# Altium PCB CH32V003-NFC-EVT-R0-1v0.PcbDoc
Units mm, origin at the board's own origin, x right, y up, seen from the top; angles counter-clockwise.
Board outline 40 x 80 mm, 2 copper layers (Top Layer, Bottom Layer); 47 components, 37 nets, 140 pads, 149 vias.
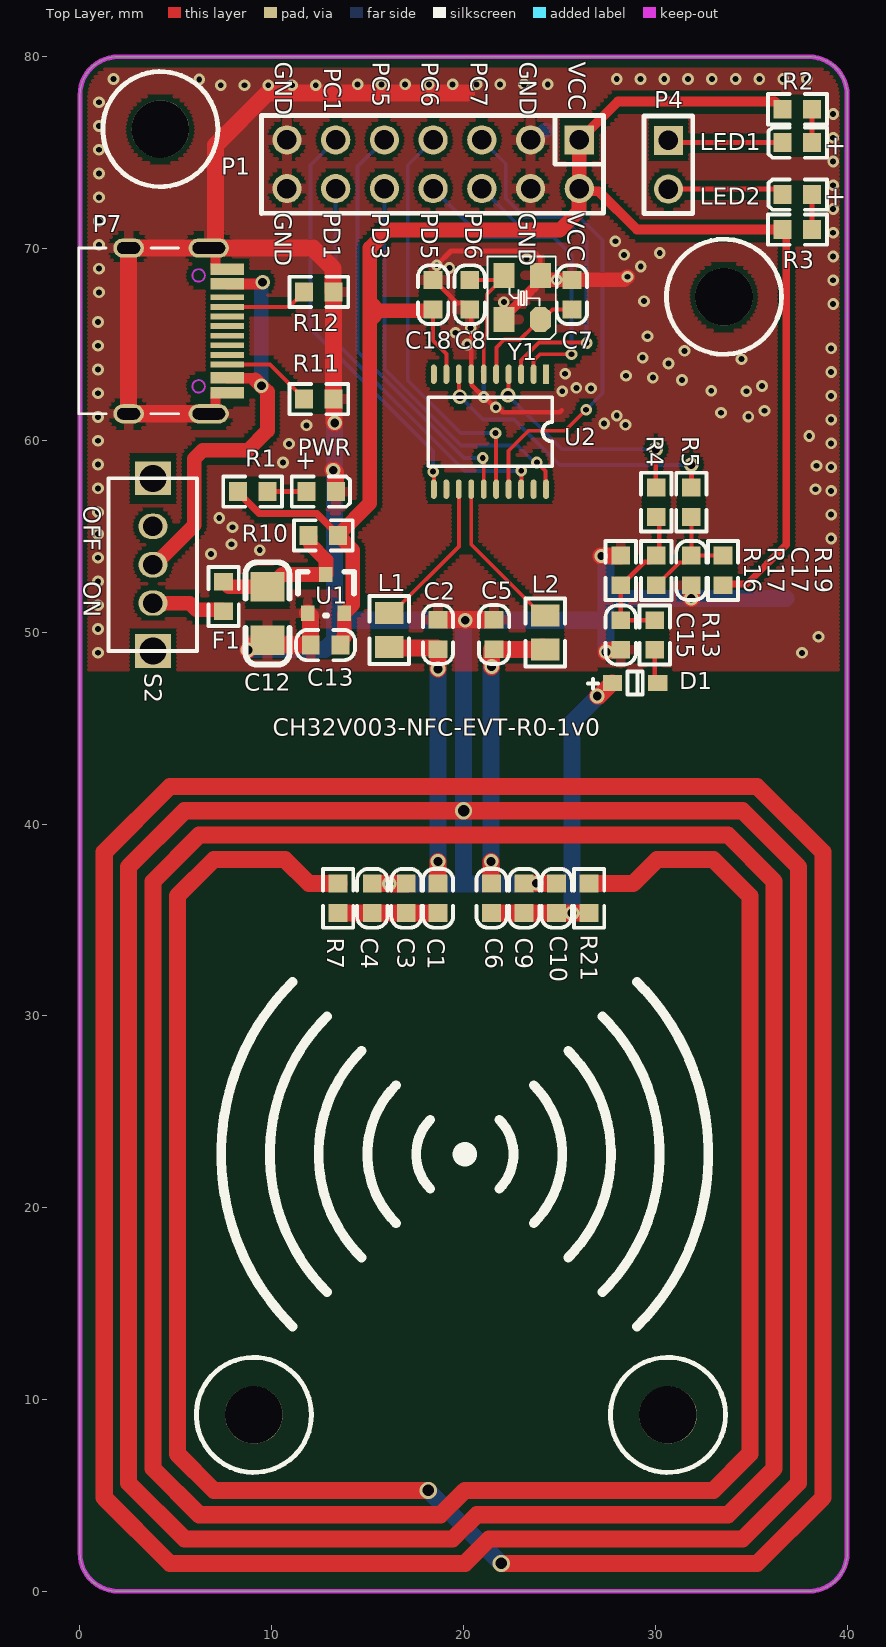
[diagram p0: Top Layer view]
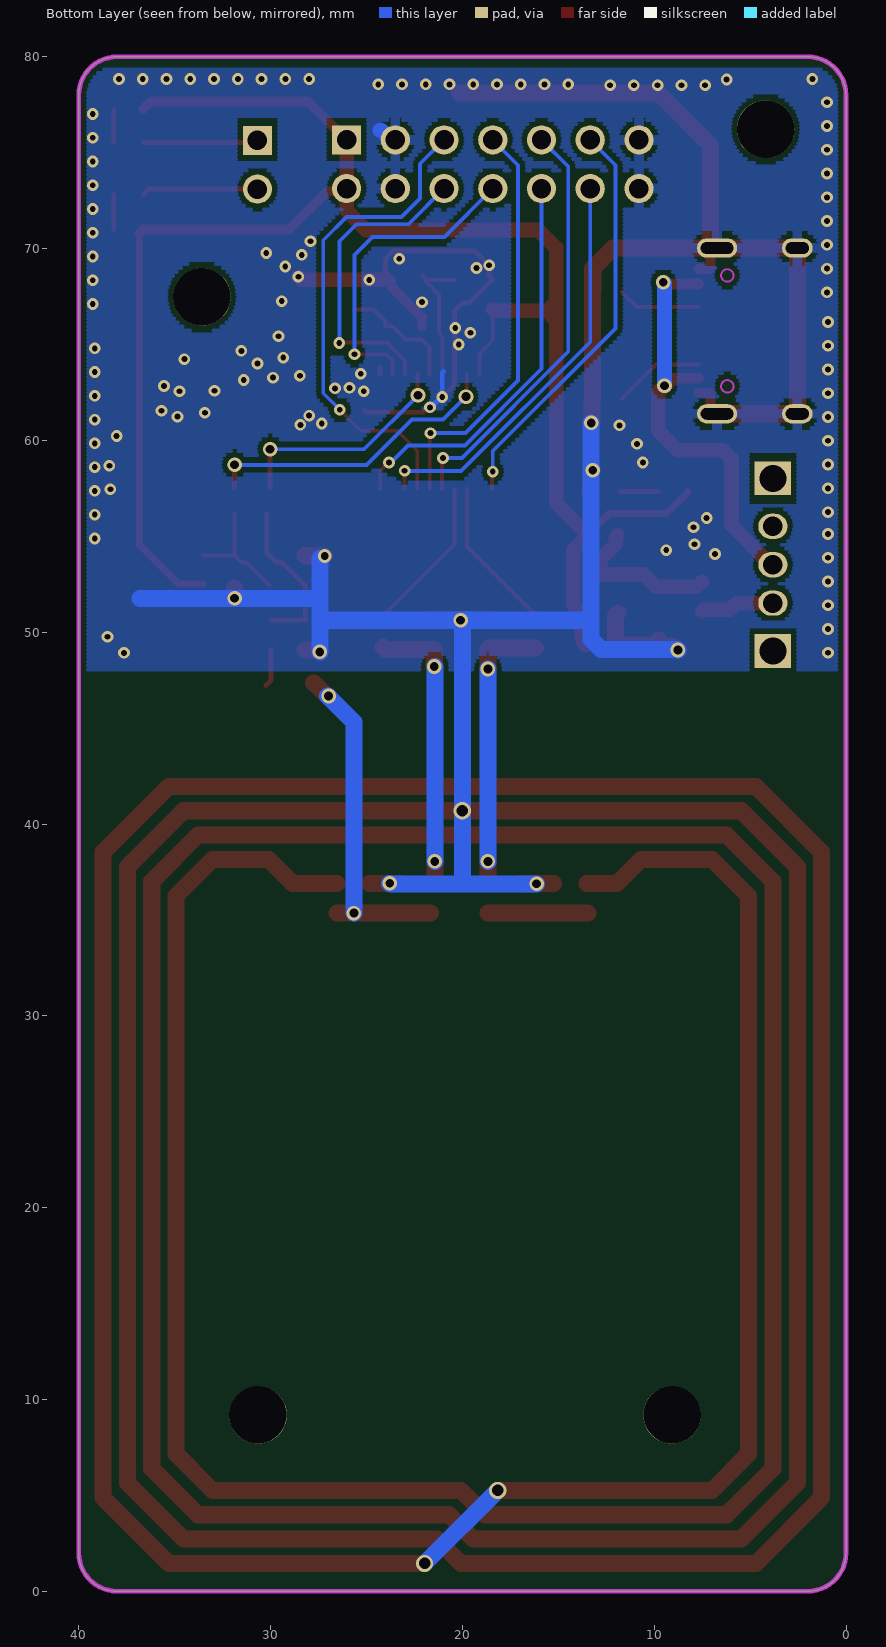
[diagram p1: Bottom Layer view, seen from below]

## Layer stack, top to bottom
Top Solder: solder mask 0.0102, Solder Resist, Dk 3.5
Top Layer: signal copper 0.0356
Dielectric 1: dielectric 0.32, FR-4, Dk 4.8
Bottom Layer: signal copper 0.0356
Bottom Solder: solder mask 0.0102, Solder Resist, Dk 3.5

## Board outline
0,2 0,78 cw(c2,78) 2,80 38,80 cw(c38,78) 40,78 40,2 cw(c38,2) 38,0 2,0 cw(c2,2)

## Design rules (kind name [scope] priority, off if disabled: settings)
Clearance Clearance_1 [InPolygon] p1: gap=0.254 ignorepadtopadclearanceinfootprint=FALSE
Clearance [All] p2: gap=0.152 ignorepadtopadclearanceinfootprint=FALSE except(0.203: Arc-Via Track-Via SMDPad-Via THPad-Via Via-Via Via-Fill Via-Poly Via-Region Via-Hole)
ComponentClearance [All] p1 off: gap=0.254 collisioncheckmode=3 verticalgap=0.254 showdistances=FALSE
DiffPairsRouting [All] p1: maxlimit=0.254 minlimit=0.178 mostfreqgap=0.203 toplayer_minwidth=0.152 toplayer_maxwidth=0.381 toplayer_prefwidth=0.203 bottomlayer_minwidth=0.152 bottomlayer_maxwidth=0.381 bottomlayer_prefwidth=0.203 maxuncoupledlength=12.7
MinimumSolderMaskSliver [All] p1 off: minsoldermaskwidth=0.254
PolygonConnect PolygonConnect_1 [IsVia] p1: connectstyle=Direct reliefconductorwidth=0.254 reliefentries=4 polygonreliefangle="90 Angle" airgapwidth=0.254
PolygonConnect [All] p2: connectstyle=Relief reliefconductorwidth=0.508 reliefentries=4 polygonreliefangle="90 Angle" airgapwidth=0.254
RoutingVias [All] p1: holewidth=0.406 width=0.711 viastyle="Through Hole" minholewidth=0.305 minwidth=0.61 maxholewidth=0.711 maxwidth=1.27
SilkToSilkClearance [All] p1 off: silktosilkclearance=0.254
SilkToSolderMaskClearance [IsPad] p1 off: minsilkscreentomaskgap=0.254 clearancetoexposedcopper=TRUE
SolderMaskExpansion [All] p1: expansion=0.051 istentingtop=FALSE
Width [All] p1: maxlimit=2.54 minlimit=0.152 preferedwidth=0.254
25 further rules are at their usual default settings.

## Classes and differential pairs
component class CH32V003-NFC-EVT-R0-1v0: C1 C2 C3 C4 C5 C6 C7 C8 C9 C10 C12 C13 C15 C17 C18 D1 F1 L1 L2 LED1 LED2 P1 P4 P7 PWR R1 R2 R3 R4 R5 R7 R10 R11 R12 R13 R16 R17 R19 R21 S2 U1 U2 Y1

## Components (designator, comment, footprint, x,y, rotation, side; value= is the part's Value field where it differs from the comment)
C1 "30pF" 0603_C 18.669,36.897 r270 top
C2 "100pF" 0603_C 18.669,50.648 r270 top
C3 "NC" 0603_C 17.018,36.897 r270 top
C4 "220pf" 0603_C 15.24,36.897 r270 top
C5 "100pF" 0603_C 21.59,49.108 r90 top
C6 "30pF" 0603_C 21.463,36.897 r270 top
C7 "20pF" 0603_C 25.654,68.367 r270 top
C8 "20pF" 0603_C 20.32,66.827 r90 top
C9 "NC" 0603_C 23.156,35.357 r90 top
C10 "220pf" 0603_C 24.85,35.357 r90 top
C12 "10uF" 3216_C 9.779,52.375 r90 top
C13 "2.2uF" 0603_C 12.037,49.327 r0 top
C15 "110pF" 0603_C 28.194,49.082 r90 top
C17 "110pF" 0603_C 31.877,52.451 r90 top
C18 "0.1uF" 0603_C 18.415,68.367 r270 top value=15pF
D1 "Diode BAS70WS" SOD-323 27.764,47.346 r0 top
F1 "500mA" 0603 7.493,51.089 r90 top
L1 "1uH 300mΩ" 0805 16.129,51.003 r270 top
L2 "1uH 300mΩ" 0805 24.257,50.876 r270 top
LED1 "LED1   blue" 0603+ 38.176,75.523 r180 top
LED2 "LED2  blue" 0603+ 38.176,72.813 r180 top
P1 "Header 7X2" IDC14-2.54mm 26.035,75.667 r270 top
P4 "2HEAD" SIP2-2.54mm 30.683,75.641 r180 top
P7 "TYPE-C" TYPE-C-Receptacle-2.0 7.69,65.708 r270 top
PWR "POWER  red" 0603+ 11.811,57.328 r0 top
R1 "1K" 0603 9.779,57.328 r180 top
R2 "1K" 0603 36.636,77.267 r0 top
R3 "1K" 0603 36.636,70.993 r0 top
R4 "20k" 0603 30.048,57.547 r270 top
R5 "110k" 0603 31.877,56.007 r90 top
R7 "1Ω(4.7Ω)" 0603 13.462,35.357 r90 top
R10 "0R" 0603 11.922,55.042 r0 top value=NC(0R)
R11 "0R" 0603 11.684,62.154 r0 top value=NC(5.1K)
R12 "0R" 0603 11.684,67.742 r0 top value=NC(5.1K)
R13 "1k" 0603 29.972,49.082 r90 top
R16 "18K" 0603 28.194,53.991 r270 top
R17 "27K" 0603 30.048,52.451 r90 top
R19 "5.1M" 0603 33.528,52.451 r90 top
R21 "1Ω(4.7Ω)" 0603 26.543,35.357 r90 top
S2 "SW" SW1 3.81,53.518 r270 top
U1 "6219P33M" SOT-23 11.877,50.99 r0 top
U2 "CH32V003F4P6" TSSOP20 24.303,63.449 r180 top
Y1 "13.56MHz" XT3225 24.003,66.305 r90 top
? "Comment" HOLE 4.191,76.225 r0 top
? "Comment" HOLE 33.579,67.488 r0 top
? "Comment" HOLE 30.658,9.195 r0 top
? "Comment" HOLE 9.068,9.195 r0 top

## Footprints (in the part's own frame and the unit in brackets; to place one, negate y for a bottom-side part, rotate by r counter-clockwise, add the part's x,y. Pads: shape width x height; smd on the part's side, far side on the other; paste and mask are expansions set on the pad)
0603 [mm]
  rect 0.93x0.98 smd: 1(0,0) 2(1.54,0)
  silkscreen extent -0.76,-0.79 2.3,0.79
0603+ [mm]
  rect 0.93x0.98 smd: 1(0,0) 2(1.54,0)
  silkscreen extent -0.76,-0.79 2.27,0.79
0603_C [mm]
  rect 0.93x0.98 smd mask+0.051: 1(0,0) 2(1.54,0)
  silkscreen extent -0.76,-0.79 2.31,0.79
0805 [mm]
  rect 1.16x1.47 smd: 1(0,0) 2(1.78,0)
  silkscreen extent -0.88,-1.04 2.66,1.03
3216_C [mil]
  rect 60x70 smd: 1(0,0) 2(-110,0)
  silkscreen extent -160,-45 50,45
HOLE [mm]
  round 3 hole 3: 0(0,0)
  silkscreen extent -3,-3 3,3
IDC14-2.54mm [mil]
  rect 60x60 hole 40: 1(0,0)
  round 60 hole 40: 2(100,0) 3(0,-100) 4(100,-100) 5(0,-200) 6(100,-200) 7(0,-300) 8(100,-300) 9(0,-400) 10(100,-400) 11(0,-500) 12(100,-500) 13(0,-600) 14(100,-600)
  silkscreen extent -50,-652 151,50
SIP2-2.54mm [mil]
  rect 60x60 hole 40: 1(0,0)
  round 60 hole 40: 2(0,100)
  silkscreen extent -50,-50 50,150
SOD-323 [mm]
  rect 1x0.83 smd: 1(0,0) 2(2.36,0)
  silkscreen extent -1.28,-0.6 1.58,0.6
SOT-23 [mm]
  rect 0.7x0.8 smd: 1(0,0) 2(1.9,0) 3(0.95,2.02)
  silkscreen extent -0.51,-0.13 2.41,2.16
SW1 [mm]
  rect 1.75x1.9 hole 1.4: 0(-4.5,0) 0(4.5,0)
  oval 1.321x1.524 hole 1.016: 1(0,0) 2(-2,0) 3(2,0)
  silkscreen extent -4.51,-2.31 4.5,2.29
TSSOP20 [mil]
  rect 12x40 smd: 1(0,0)
  oval 12x40 smd: 2(25.6,0) 3(51.2,0) 4(76.8,0) 5(102.4,0) 6(128,0) 7(153.5,0) 8(179.1,0) 9(204.7,0) 10(230.3,0) 11(230.3,236) 12(204.7,236) 13(179.1,236) 14(153.5,236) 15(128,236) 16(102.4,236) 17(76.8,236) 18(51.2,236) 19(25.6,236) 20(0,236)
  silkscreen extent -13,47 242,189
TYPE-C-Receptacle-2.0 [mm]
  oval 1x2.1 hole 0.6 slot 1.7 at 90 deg: 0(-4.32,-0.97) 0(4.32,-0.97)
  oval 1x1.6 hole 0.6 slot 1.2 at 90 deg: 0(-4.32,-5.15) 0(4.32,-5.15)
  rect 0.6x1.75 smd mask+0.051: A1(-3.225,0) A4(-2.45,0) B1(3.225,0) B4(2.45,0)
  rect 0.3x1.75 smd mask+0.051: A5(-1.25,0) A6(-0.25,0) A7(0.25,0) A8(1.25,0) B5(1.75,0) B6(0.75,0) B7(-0.75,0) B8(-1.75,0)
  Keep-Out Layer circle w0.1: c2.89,-1.5 r0.325
  Keep-Out Layer circle w0.1: c-2.89,-1.5 r0.325
  silkscreen extent -4.32,-7.75 4.32,-2.55
XT3225 [mm]
  oct 1.3x1.1 smd: 1(0,0)
  rect 1.3x1.1 smd: 2(2.3,0) 3(2.3,1.9) 4(0,1.9)
  silkscreen extent -1.02,-0.8 3.27,2.74

## Part data
C1 C2 C3 C4 C5 C6 C7 C8 C9 C10 C12 C13 C15 C17: library part CAP, "Capacitor"
C18: library part Cap, "Capacitor", LatestRevisionDate=17-Jul-2002, LatestRevisionNote="Re-released for DXP Platform.", PackageReference=RAD-0.3, Published=8-Jun-2000, Publisher="Altium Limited"
D1: library part "Diode BAS70", "Silicon AF Schottky Diode for High-Speed Switching", ComponentLink1Description="Manufacturer Link", ComponentLink1URL=http://www.infineon.com/, ComponentLink2Description=Datasheet, ComponentLink2URL=http://www.infineon.com/upload/Document/cmc_upload/documents/009/382/bas40_bas140series_1.pdf, DatasheetVersion=Oct-1999, LatestRevisionDate=29-May-2009, LatestRevisionNote="IPC-7351 Footprint Added.", Note="Pin 2 is not connected and not drawn.", PackageDescription="3-Pin SOT-23 Package 0.95 mm Pitch, 2.5 mm Lead Span", PackageReference=SOT-23, PackageVersion=Sep-2001, Published=21-Mar-2003, Publisher="Altium Limited"
F1: library part FUSE1, "Fuse"
L1 L2: library part INDUCTOR
LED1 LED2 PWR: library part LED0, "Typical INFRARED GaAs LED", LatestRevisionDate=08-Jul-2005, LatestRevisionNote="Mech Layer 1 removed.", PackageReference=LED-0, Published=8-Jun-2000, Publisher="Altium Limited"
P1: "Header, 7-Pin, Dual row", LatestRevisionDate=17-Jul-2002, LatestRevisionNote="Re-released for DXP Platform.", Publisher="Altium Limited"
P7: library part TYPE-C1
R1 R2 R3 R10 R11 R12: library part "Res Semi", "Semiconductor Resistor", LatestRevisionDate=17-Jul-2002, LatestRevisionNote="Re-released for DXP Platform.", PackageReference=AXIAL-0.5, Published=8-Jun-2000, Publisher="Altium Limited"
R4 R5 R7 R13 R16 R17 R19 R21: library part RES
U2: "RISC-V MCU, 48MHz"
Y1: library part XTAL, "Crystal Oscillator", LatestRevisionDate=17-Jul-2002, LatestRevisionNote="Re-released for DXP Platform.", PackageDescription="Crystal, Thru-Hole; 2 Leads; Body 3.1 x 8.2 mm (Dia.xH)", PackageReference=R38, Published=8-Jun-2000, Publisher="Altium Limited"

## Via types
v1: diameter 0.61, hole 0.305, Top Layer to Bottom Layer, tented both sides, 125 vias
v2: diameter 0.762, hole 0.457, Top Layer to Bottom Layer, tented both sides, 20 vias
v3: diameter 0.9, hole 0.6, Top Layer to Bottom Layer, tented both sides, 3 vias
v4: diameter 0.711, hole 0.406, Top Layer to Bottom Layer, tented both sides, 1 vias

## Nets (pads, with @x,y where several pads share a name; then routed paths per layer and width w, separated by ;. In a path a pad name is that pad's centre, name@x,y a point inside that pad or via, vN(x,y) a via of type N, cw(c..) or ccw(c..) an arc to the next point about the centre after c; other vN are vias at no path point)
+5V: P7.A4 P7.B4 S2.1 | length 22.6
  Top Layer w0.559: P7.B4 7.711,63.237 9.077,63.237 9.144,63.17 ; P7.A4 9.378,68.158 9.47,68.25 v2(9.525,68.25)
  Top Layer w0.762: S2.1 3.912,53.518 5.969,55.575 5.969,59.04 6.415,59.487 8.763,59.487 9.779,60.503 9.779,62.535 v2(9.461,62.852) 9.144,63.17
  Bottom Layer w0.762: v2(9.461,62.852) 9.461,68.186 v2(9.525,68.25)
ANT_OUT_0: L1.1 U2.13 | length 8
  Top Layer w0.203: L1.1 16.284,51.003 19.754,54.473 U2.13
ANT_OUT_1: L2.1 U2.14 | length 8.3
  Top Layer w0.203: U2.14 20.404,54.574 24.102,50.876 L2.1
GND: C2.1 C3.1 C4.1 C5.2 C7.1 C8.1 C9.2 C10.2 C12.2 C13.1 C15.1 C17.1 C18.1 P1.3 P1.4 P1.13 P1.14 P7.0 P7.A1 P7.B1 PWR.2 R7.2 R11.2 R12.2 R16.1 R21.2 U1.1 U2.7 Y1.2 Y1.4 | length 699.6
  Top Layer w0.254: Y1.2 24.003,69.494 23.622,69.875 19.348,69.875 v1(18.605,69.132) 18.605,68.557 C18.1 18.44,68.367 19.642,67.165 19.982,67.165 C8.1 20.404,66.744 U2.7 20.404,63.08 20.429,63.054 20.429,62.883 v1(21.053,62.259) 21.1,62.259 21.638,61.722 v1(21.686,61.722) 21.782,61.722 22.036,61.468 25.019,61.468 25.121,61.57
  Top Layer w0.508: P7.0@6.72,61.388 6.842,61.388 7.069,61.615 7.069,62.437 7.115,62.483 P7.B1 ; P7.0@6.72,70.028 6.842,70.028 7.069,69.801 7.069,68.979 7.115,68.933 P7.A1 ; Y1.4@22.103,65.95 Y1.4@22.103,66.05 ; Y1.4@22.103,66.405 23.707,68.009 23.707,68.309 Y1.2 24.222,68.387 24.835,68.387 v1(24.854,68.367)
  Top Layer w0.762: Y1.2@24.13,68.367 v1(24.854,68.367) C7.1 28.388,68.367 v1(28.55,68.529)
  Top Layer w0.889: P7.0@6.72,61.388 2.54,61.388 2.54,70.028 P7.0@6.72,70.028 ; P7.0@6.842,70.028 P7.0@7.01,70.028 ; v2(8.763,49.073) 8.953,49.263 9.461,49.263 C12.2 9.779,49.327 C13.1 12.017,49.347 12.017,50.85 U1.1 ; v2(13.208,58.445) 13.33,58.323 13.33,57.348 PWR.2 ; v2(13.284,60.909) 13.244,60.949 13.244,62.133 R11.2 R12.2 13.203,67.762 13.203,68.965 12.141,70.028 P7.0@7.01,70.028 ; R7.2@13.507,36.897 R7.2 11.938,36.897 10.684,38.151 6.985,38.151 5.08,36.246 5.08,7.163 6.985,5.258 v3(18.161,5.258) ; C4.1 C3.1 ; v2(16.129,36.881) C3.1@17.018,36.881 ; v2(20.091,50.622) 20.086,50.628 18.69,50.628 C2.1 C5.2 ; 20.142,78.105 18.194,78.105 15.717,78.105 9.779,78.105 7.061,75.387 7.061,70.079 P7.0@7.01,70.028 ; v3(21.971,1.448) 35.306,1.448 38.735,4.877 38.735,38.532 35.306,41.961 4.699,41.961 1.27,38.532 1.27,4.877 4.699,1.448 20.066,1.448 21.336,2.718 34.544,2.718 37.465,5.639 37.465,37.77 34.544,40.691 v3(20.002,40.691) 5.461,40.691 2.54,37.77 2.54,5.639 5.461,2.718 19.431,2.718 20.701,3.988 33.782,3.988 36.195,6.401 36.195,37.008 33.782,39.421 6.223,39.421 3.81,37.008 3.81,6.401 6.223,3.988 18.796,3.988 20.066,5.258 33.02,5.258 34.925,7.163 34.925,36.246 33.02,38.151 30.099,38.151 28.845,36.897 R21.2 ; C9.2 C10.2 24.839,36.907 v2@24.111,36.907 ; v2(23.791,36.907) v2@24.111,36.907 ; v2@24.122,36.897 v2@24.111,36.907 ; v4(27.178,53.975) 28.178,53.975 R16.1 ; v2(27.432,48.971) 27.522,49.062 28.173,49.062 C15.1 ; v2(31.877,51.765) C17.1@31.877,52.299
  Bottom Layer w0.254: 20.98,63.602 21.053,63.529 v1(21.053,62.259) 21.1,62.259 21.638,61.722 v1(21.686,61.722)
  Bottom Layer w0.762: P1.3@23.641,75.812 23.847,75.812 24.204,76.169 24.302,76.169
  Bottom Layer w0.889: v2(8.763,49.073) 8.787,49.097 12.763,49.097 13.284,49.617 13.284,50.622 13.284,58.445 v2(13.284,60.909) ; 13.577,50.622 v2(20.091,50.622) ; v2(16.129,36.881) 18.225,36.881 18.238,36.868 20.002,36.868 ; v3(18.161,5.258) v3(21.971,1.448) ; v2(23.791,36.907) 23.752,36.868 20.002,36.868 ; v2(27.432,48.971) 27.432,50.597 ; v4@27.432,53.848 27.432,51.765 27.432,50.597 ; 27.559,51.765 v2(31.877,51.765) 36.805,51.765 ; 20.002,36.868 v3(20.002,40.691) 20.002,50.533 v2(20.091,50.622) ; v2(20.091,50.622) 27.407,50.622 27.432,50.597
  other v1: 0.94,48.928 37.643,48.92 38.506,49.759 0.94,50.167 0.94,51.406 0.94,52.644 0.94,53.883 6.833,54.077 9.373,54.28 7.899,54.585 39.167,54.889 0.94,55.122 7.95,55.474 7.264,55.956 39.167,56.128 0.94,56.261 39.167,57.367 38.354,57.455 0.94,57.5 39.167,58.606 38.405,58.674 0.94,58.738 10.592,58.852 10.897,59.817 39.167,59.844 0.94,59.977 38.024,60.223 11.811,60.782 28.448,60.808 27.33,60.884 39.167,61.083 0.94,61.216 34.849,61.239 27.991,61.29 33.426,61.443 35.687,61.544 39.167,62.322 0.94,62.455 25.146,62.56 34.747,62.56 32.918,62.586 26.645,62.711 25.883,62.738 35.56,62.84 31.394,63.144 29.87,63.271 28.473,63.373 25.298,63.475 39.167,63.56 0.94,63.693 30.683,64.008 34.493,64.237 29.337,64.313 31.521,64.668 39.167,64.799 0.94,64.932 20.193,64.999 29.591,65.43 19.583,65.608 20.371,65.862 0.94,66.171 39.268,67.107 22.103,67.209 29.413,67.259 0.991,67.716 39.268,68.346 0.991,68.955 19.261,68.986 29.235,69.063 23.292,69.469 39.268,69.584 28.372,69.672 30.226,69.774 0.991,70.194 27.915,70.383 39.268,70.823 0.991,71.433 39.268,72.062 0.991,72.671 39.268,73.3 0.991,73.91 39.268,74.539 0.991,75.149 39.268,75.778 0.991,76.387 39.268,77.016 0.991,77.626 7.342,78.511 8.581,78.511 9.82,78.511 11.059,78.511 12.297,78.511 14.478,78.562 15.717,78.562 16.955,78.562 18.194,78.562 19.433,78.562 20.672,78.562 21.91,78.562 23.149,78.562 24.388,78.562 6.223,78.816 1.753,78.842 27.991,78.842 29.23,78.842 30.468,78.842 31.707,78.842 32.946,78.842 34.184,78.842 35.423,78.842 36.662,78.842 37.9,78.842
LED1: LED1.2 P4.1 | length 6
  Top Layer w0.254: P4.1 30.802,75.523 LED1.2
LED2: LED2.2 P4.2 | length 6.1
  Top Layer w0.254: P4.2 36.348,73.101 LED2.2
NetC1_1: C1.1 C2.2 L1.2 | length 14.8
  Top Layer w0.635: L1.2 L1.2@16.186,49.166 ; C2.2@18.611,49.166 C2.2
  Top Layer w0.889: L1.2@16.186,49.166 C2.2@18.611,49.166 ; C1.1@18.669,36.922 v2(18.669,38.049) ; v2(18.669,48.082) C2.2
  Bottom Layer w0.889: v2(18.669,38.049) v2(18.669,48.082)
NetC1_2: C1.2 C3.2 C4.2 R7.1 | length 5.2
  Top Layer w0.889: R7.1 C1.2
NetC5_1: C5.1 C6.1 L2.2 | length 14.9
  Top Layer w0.635: v2@21.352,48.199 21.452,48.199 v2(21.463,48.209)
  Top Layer w0.889: C6.1@21.438,36.897 v2(21.438,38.049) ; C5.1@21.463,49.108 21.473,49.098 24.005,49.098 L2.2@24.13,49.223 ; v2@21.467,48.199 C5.1@21.467,48.985
  Bottom Layer w0.889: v2(21.438,38.049) v2@21.438,48.199
NetC6_2: C6.2 C9.1 C10.1 D1.1 R21.1 | length 17.8
  Top Layer w0.889: C6.2@21.666,35.357 C9.1 v2(25.654,35.357) R21.1 ; v2(26.975,46.672) 27.065,46.672 27.738,47.346 D1.1
  Bottom Layer w0.889: v2(25.654,35.357) 25.654,45.306 v2@27.02,46.672
NetC12_1: C12.1 F1.2 R10.1 U1.3 | length 8.1
  Top Layer w0.762: F1.2 7.518,52.629 7.772,52.375 C12.1 9.906,52.375 10.541,53.01 12.815,53.01 U1.3 12.827,53.764 12.006,54.585 12.006,54.958 R10.1
NetC15_2: C15.2 R4.2 R13.2 R16.2 R17.2 | length 8.3
  Top Layer w0.254: R13.2 C15.2 R16.2 28.219,52.451 29.421,53.653 29.71,53.653 R17.2 30.201,54.143 R4.2@30.201,56.159
NetC17_2: C17.2 R5.1 R17.1 R19.2 | length 6.2
  Top Layer w0.203: R17.1 30.073,52.451 31.25,53.628 31.514,53.628 C17.2 R5.1@31.877,56.155 ; C17.2@31.953,53.991 R19.2
NetD1_2: D1.2 R13.1 | length 2
  Top Layer w0.254: R13.1 29.972,47.498 D1.2@30.24,47.23
NetF1_1: F1.1 S2.3 | length 3.9
  Top Layer w0.762: S2.3 5.715,51.518 6.06,51.173 7.409,51.173 F1.1
NetLED1_1: LED1.1 R2.2 | length 1.7
  Top Layer w0.254: LED1.1 R2.2
NetLED2_1: LED2.1 R3.2 | length 1.8
  Top Layer w0.254: R3.2 LED2.1
NetP7_A5: P7.A5 R12.1 | length 4.3
  Top Layer w0.203: P7.A5 10.9,66.958 11.296,67.353 11.321,67.353 11.684,67.717 R12.1
NetP7_B5: P7.B5 R11.1 | length 4.8
  Top Layer w0.203: P7.B5 9.905,63.958 11.684,62.179 R11.1
NetPWR_1: PWR.1 R1.1 | length 2
  Top Layer w0.254: R1.1 PWR.1
PC0: U2.10
PC1: P1.11 U2.11 | length 21.5
  Top Layer w0.203: v1(18.415,58.369) 18.453,58.331 U2.11
  Bottom Layer w0.203: P1.11 12.014,74.346 12.014,65.837 18.415,59.436 18.415,58.389 18.395,58.369 v1(18.415,58.369)
PC2: U2.12
PC5: P1.9 U2.15 | length 22.1
  Top Layer w0.203: v1(21.006,59.08) 21.054,59.032 21.054,57.457 U2.15
  Bottom Layer w0.203: P1.9 14.478,74.27 14.478,64.628 20.025,59.08 v1(21.006,59.08)
PC6: P1.7 U2.16 | length 21.7
  Top Layer w0.203: v1(21.666,60.376) 21.702,60.34 U2.16
  Bottom Layer w0.203: P1.7 17.094,74.346 17.094,63.119 19.837,60.376 v1(21.666,60.376)
PC7: P1.5 U2.17 | length 25.6
  Top Layer w0.203: U2.17 22.352,59.461 23.393,60.503 25.298,60.503 v1(26.391,61.595)
  Bottom Layer w0.203: P1.5 22.2,74.422 22.2,72.619 23.165,71.653 26.035,71.653 27.254,70.434 27.254,62.459 v1(26.391,61.595)
PD0: R5.2 U2.8 | length 16.2
  Top Layer w0.203: U2.8 19.773,63.43 19.773,62.32 v2(19.812,62.281)
  Top Layer w0.254: R5.2 v2(31.877,58.725)
  Bottom Layer w0.203: v2(19.812,62.281) 21.006,61.087 22.633,61.087 24.995,58.725 v2@32.164,58.725
PD1: P1.12 U2.18 | length 21.4
  Top Layer w0.203: U2.18 23.012,57.465 v1(23.012,58.42)
  Bottom Layer w0.203: P1.12 13.335,65.126 20.066,58.395 22.987,58.395 v1(23.012,58.42)
PD2: U2.19
PD3: P1.10 U2.20 | length 21
  Top Layer w0.203: v1(23.825,58.852) 24.283,58.394 24.283,57.474 U2.20
  Bottom Layer w0.203: P1.10 15.875,63.734 19.868,59.741 22.826,59.741 23.715,58.852 v1(23.825,58.852)
PD4: U2.1 | length 0.4
  Top Layer w0.254: U2.1@24.303,63.805 U2.1 U2.1@24.321,63.467
PD5: P1.8 U2.2 | length 16.7
  Top Layer w0.203: U2.2 23.652,64.164 23.979,64.491 v1(25.629,64.491)
  Bottom Layer w0.203: P1.8 20.93,70.612 24.689,70.612 25.629,69.672 v1(25.629,64.491)
PD6: P1.6 U2.3 | length 16.4
  Top Layer w0.203: U2.3 23.002,64.164 23.938,65.1 26.391,65.1 v1(26.416,65.075)
  Bottom Layer w0.203: P1.6 22.811,71.27 25.529,71.27 26.416,70.383 v1(26.416,65.075)
PD7: R4.1 U2.4 | length 12
  Top Layer w0.203: v2(22.316,62.348) 22.334,62.366 22.334,63.431 U2.4
  Top Layer w0.254: v2(30.023,59.538) 30.023,57.572 R4.1
  Bottom Layer w0.203: v2(22.316,62.348) 25.127,59.538 v2(30.023,59.538)
VCC: C13.2 C18.2 P1.1 P1.2 R1.2 R2.1 R3.1 R10.2 R19.1 U1.2 U2.9 | length 94.2
  Top Layer w0.203: C18.2@18.415,66.472 18.415,65.202 19.103,64.513 U2.9
  Top Layer w0.381: R1.2 8.239,57.303 9.357,56.185 12.344,56.185 13.462,55.067 R10.2 ; R19.1@33.528,52.511 34.782,52.511 36.83,54.559 R3.1@36.83,70.799
  Top Layer w0.508: P1.2 26.173,72.989 27.036,72.989 29.032,70.993 R3.1 R3.1@36.83,70.799 ; P1.1 28.042,77.673 36.23,77.673 36.4,77.503 36.425,77.503 36.636,77.292 R2.1
  Top Layer w0.762: R10.2 14.224,54.28 14.224,51.437 13.808,51.021 13.808,51.009 13.789,50.99 U1.2 13.777,49.719 13.661,49.604 13.661,49.411 C13.2 ; R10.2@13.462,55.067 15.113,56.718 15.113,66.243 ; 15.349,66.997 15.113,67.234 ; 15.372,66.502 15.113,66.243 ; 15.586,66.761 18.348,66.761 C18.2 ; P1.1 P1.2 26.021,73.113 26.021,71.97 25.019,70.968 16.053,70.968 15.113,70.028 15.113,67.234 ; 15.113,66.243 15.113,67.234
XI: C7.2 U2.5 Y1.1 | length 6.3
  Top Layer w0.203: U2.5 21.717,63.464 21.717,64.846 22.123,65.253 22.95,65.253 23.647,65.95 24.003,65.95 24.003,66.19 24.64,66.827 C7.2
XO: C8.2 U2.6 Y1.3 | length 7.1
  Top Layer w0.203: C8.2@20.447,68.367 21.865,68.367 Y1.3@21.865,68.267 ; U2.6 21.052,65.425 21.209,65.583 21.209,67.611 21.915,68.317 21.915,68.417 Y1.3
pads on no net: ?.0 P7.A6 P7.A7 P7.A8 P7.B6 P7.B7 P7.B8 S2.0 S2.2

## Polygon pours and split planes (outlines as drawn)
GND on Bottom Layer "GND" (hatched Horizontal grid 0.203 track 0.203, remove dead copper, pour order 1): 40,80 40,45.771 0,45.771 0,80
GND on Top Layer "GND" (hatched Horizontal grid 0.203 track 0.203, remove dead copper, pour order 0): 40,80 40,45.771 0,45.771 0,80

## Keep-outs
Keep-Out Layer:
  the board outline again, w0.254

## Other copper
Multi-Layer:
  pour cut-out: 0,0 0,48.006 40,48.006 40,0

## Silkscreen, mask and mechanical layers (free items; w line width, h text height)
Top Overlay:
  circle w0.762: c20.066,22.784 r0.254
  lines w0.508: 11.086,13.804 cw(c20.066,22.784) 11.086,31.764 ; 12.882,15.6 cw(c20.066,22.784) 12.882,29.968 ; 14.678,17.396 cw(c20.066,22.784) 14.678,28.172 ; 16.474,19.192 cw(c20.066,22.784) 16.474,26.376 ; 18.27,20.988 cw(c20.066,22.784) 18.27,24.58 ; 21.862,20.988 ccw(c20.066,22.784) 21.862,24.58 ; 23.658,19.192 ccw(c20.066,22.784) 23.658,26.376 ; 25.454,17.396 ccw(c20.066,22.784) 25.454,28.172 ; 27.25,15.6 ccw(c20.066,22.784) 27.25,29.968 ; 29.046,13.804 ccw(c20.066,22.784) 29.046,31.764
  text "GND" at 10.177,79.731 h0.89 r270
  text "PC5" at 15.277,79.731 h0.89 r270
  text "PC6" at 17.827,79.731 h0.89 r270
  text "PC7" at 20.376,79.731 h0.89 r270
  text "GND" at 22.926,79.731 h0.89 r270
  text "VCC" at 25.476,79.731 h0.89 r270
  text "PC1" at 12.727,79.434 h0.89 r270
  text "GND" at 10.16,71.857 h0.89 r270
  text "PD1" at 12.704,71.857 h0.89 r270
  text "PD3" at 15.248,71.857 h0.89 r270
  text "PD5" at 17.793,71.857 h0.89 r270
  text "PD6" at 20.083,71.857 h0.89 r270
  text "GND" at 22.881,71.857 h0.89 r270
  text "VCC" at 25.425,71.857 h0.89 r270
  text "OFF" at 0.203,56.591 h0.89 r270
  text "ON" at 0.203,52.654 h0.89 r270
  text "CH32V003-NFC-EVT-R0-1v0" at 10.058,44.602 h0.89
Mechanical 1:
  the board outline again, w0.254

## Text inside footprints (layer, text, board x,y; h text height)
LED1: Top Overlay "+" at 38.997,75.895 h1.02 r270
LED2: Top Overlay "+" at 38.997,73.254 h1.02 r270
PWR: Top Overlay "+" at 12.192,58.344 h1.02 r90